# Altium PCB CartApuce.PcbDoc
Units mm, origin at the board's own origin, x right, y up, seen from the top; angles counter-clockwise.
Board outline 152.4 x 101.6 mm, 4 copper layers (Component Side, Ground Plane, Power Plane, Solder Side), stack 0.844 mm thick; 3 components, 73 nets, 51 pads, 9 vias.
Unrouted connection lines stored in the file: 1.
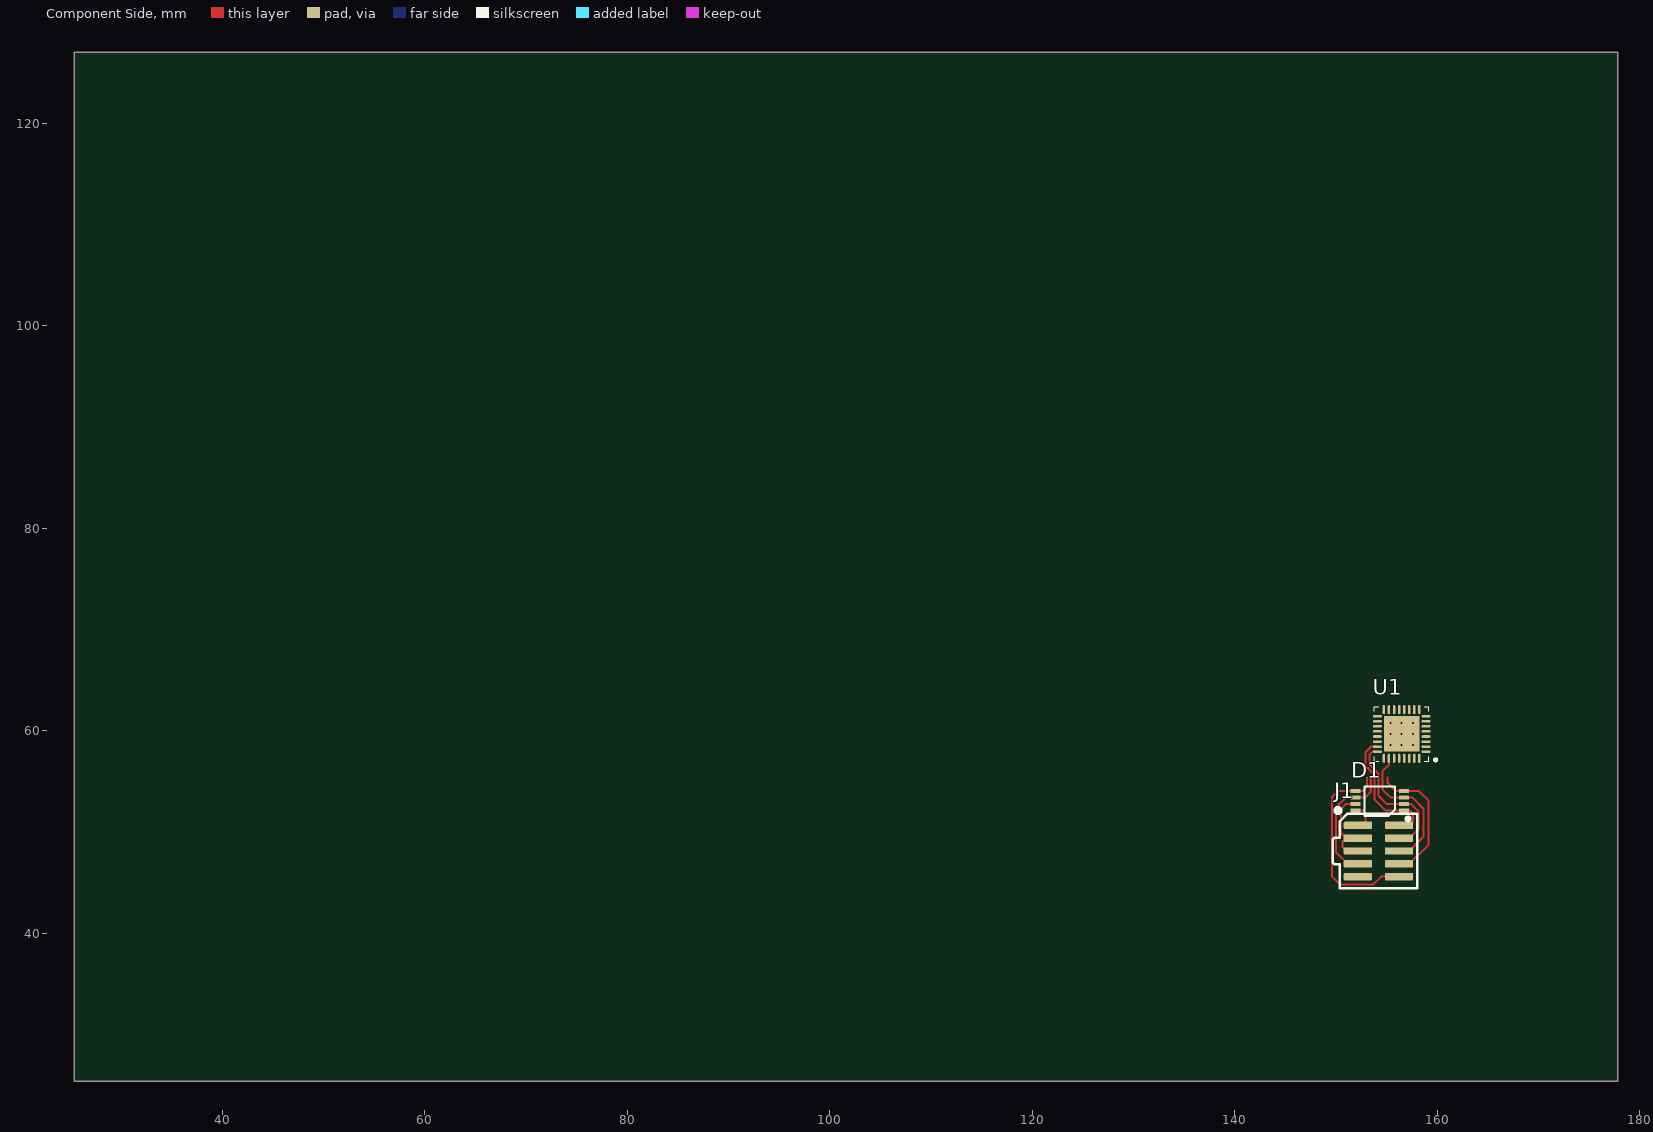
[diagram p0: Component Side view]
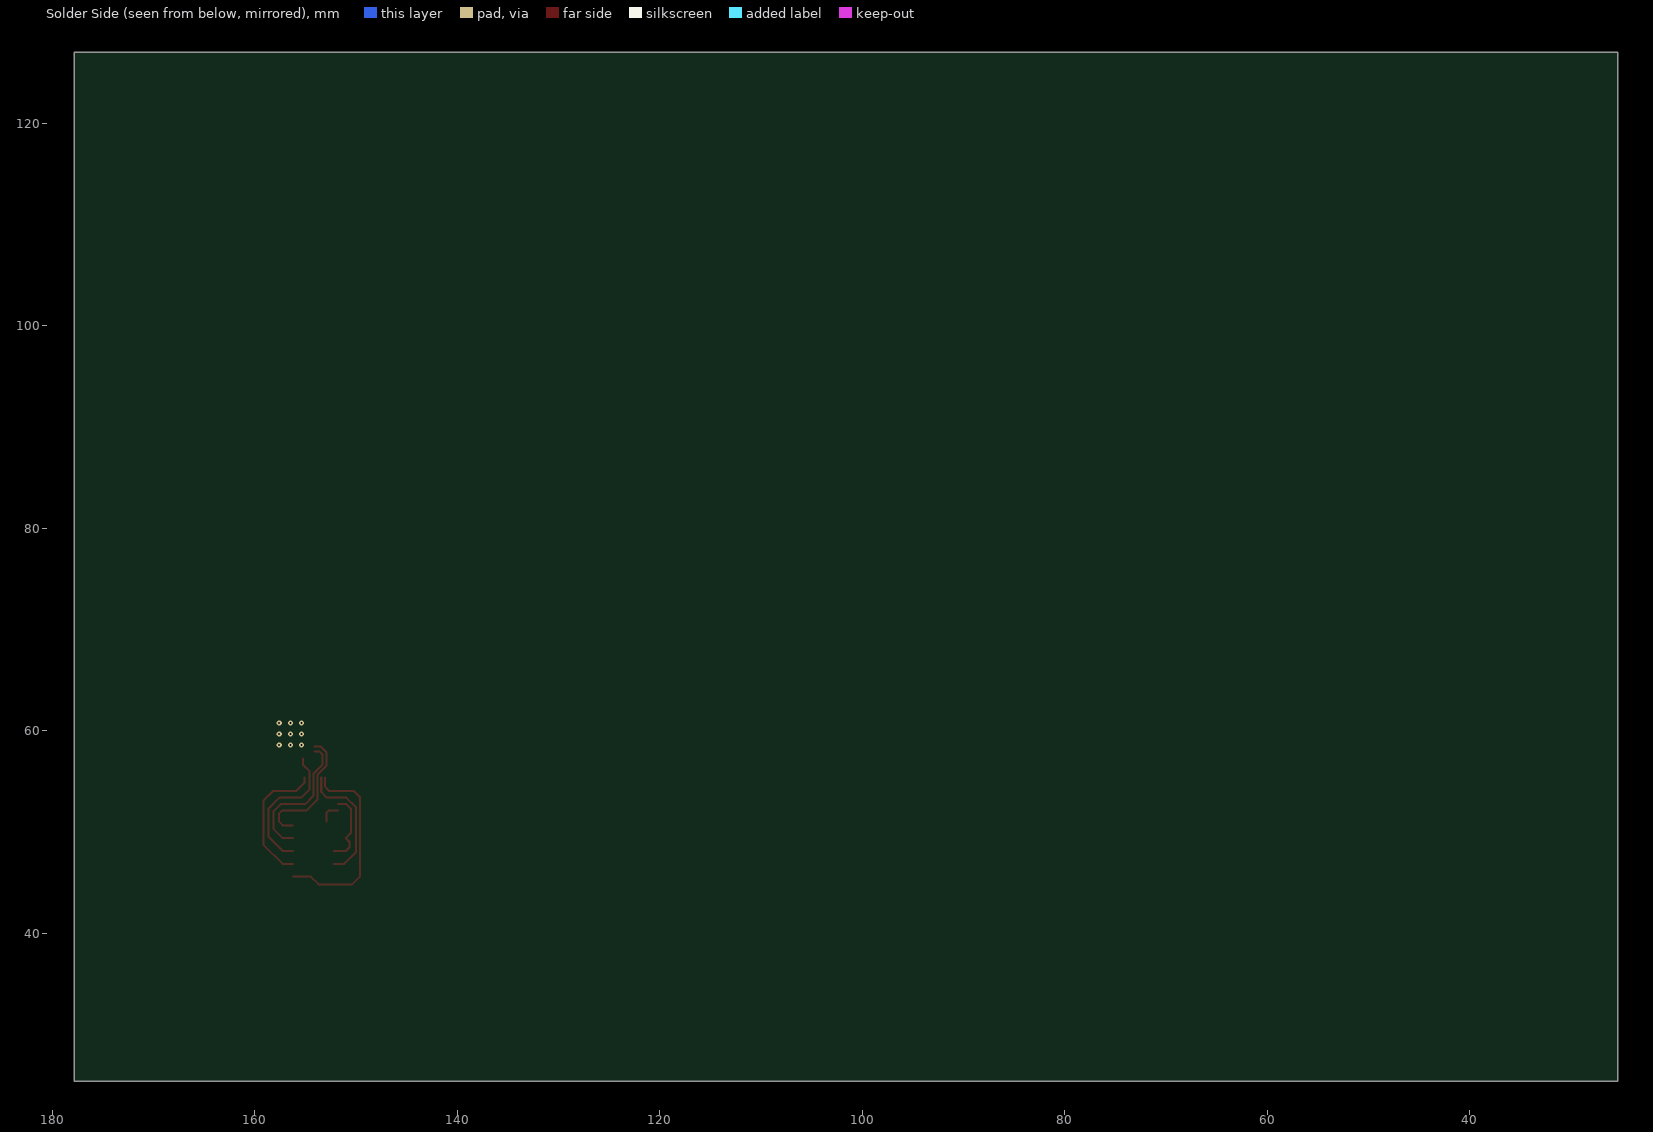
[diagram p1: Solder Side view, seen from below]
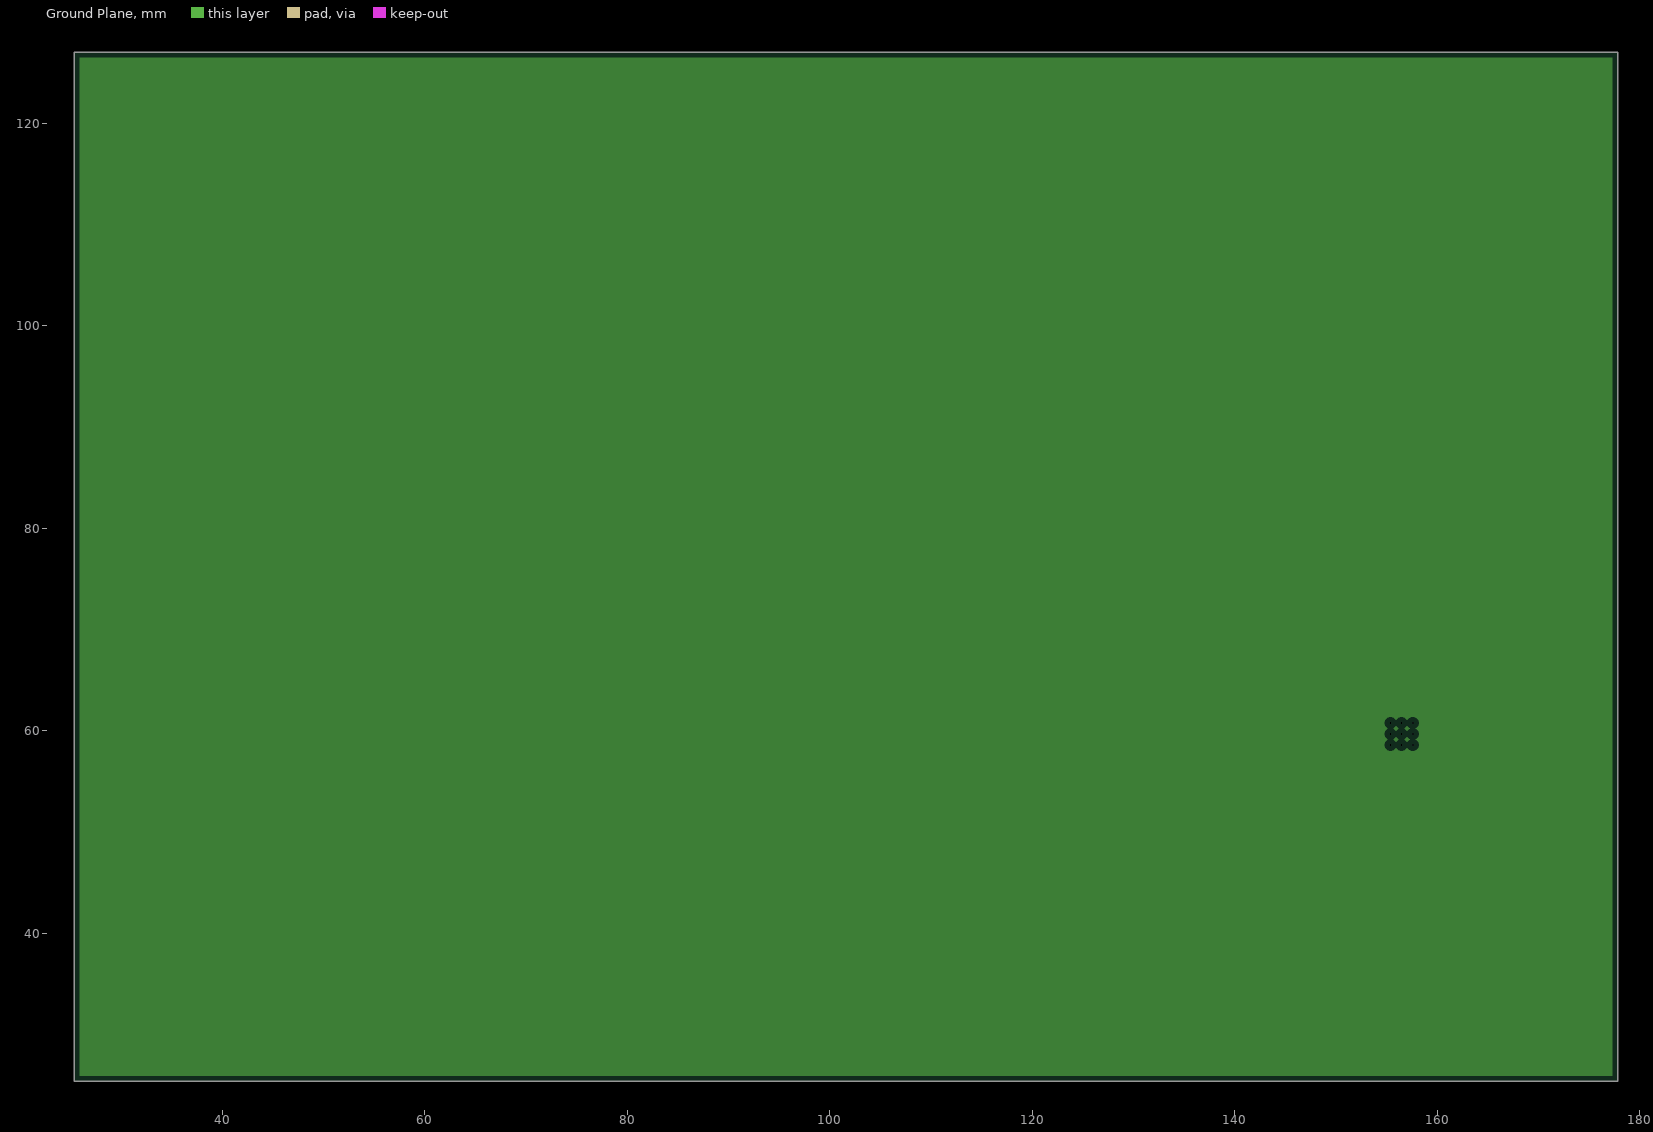
[diagram p2: Ground Plane, clearances drawn from the general rule]
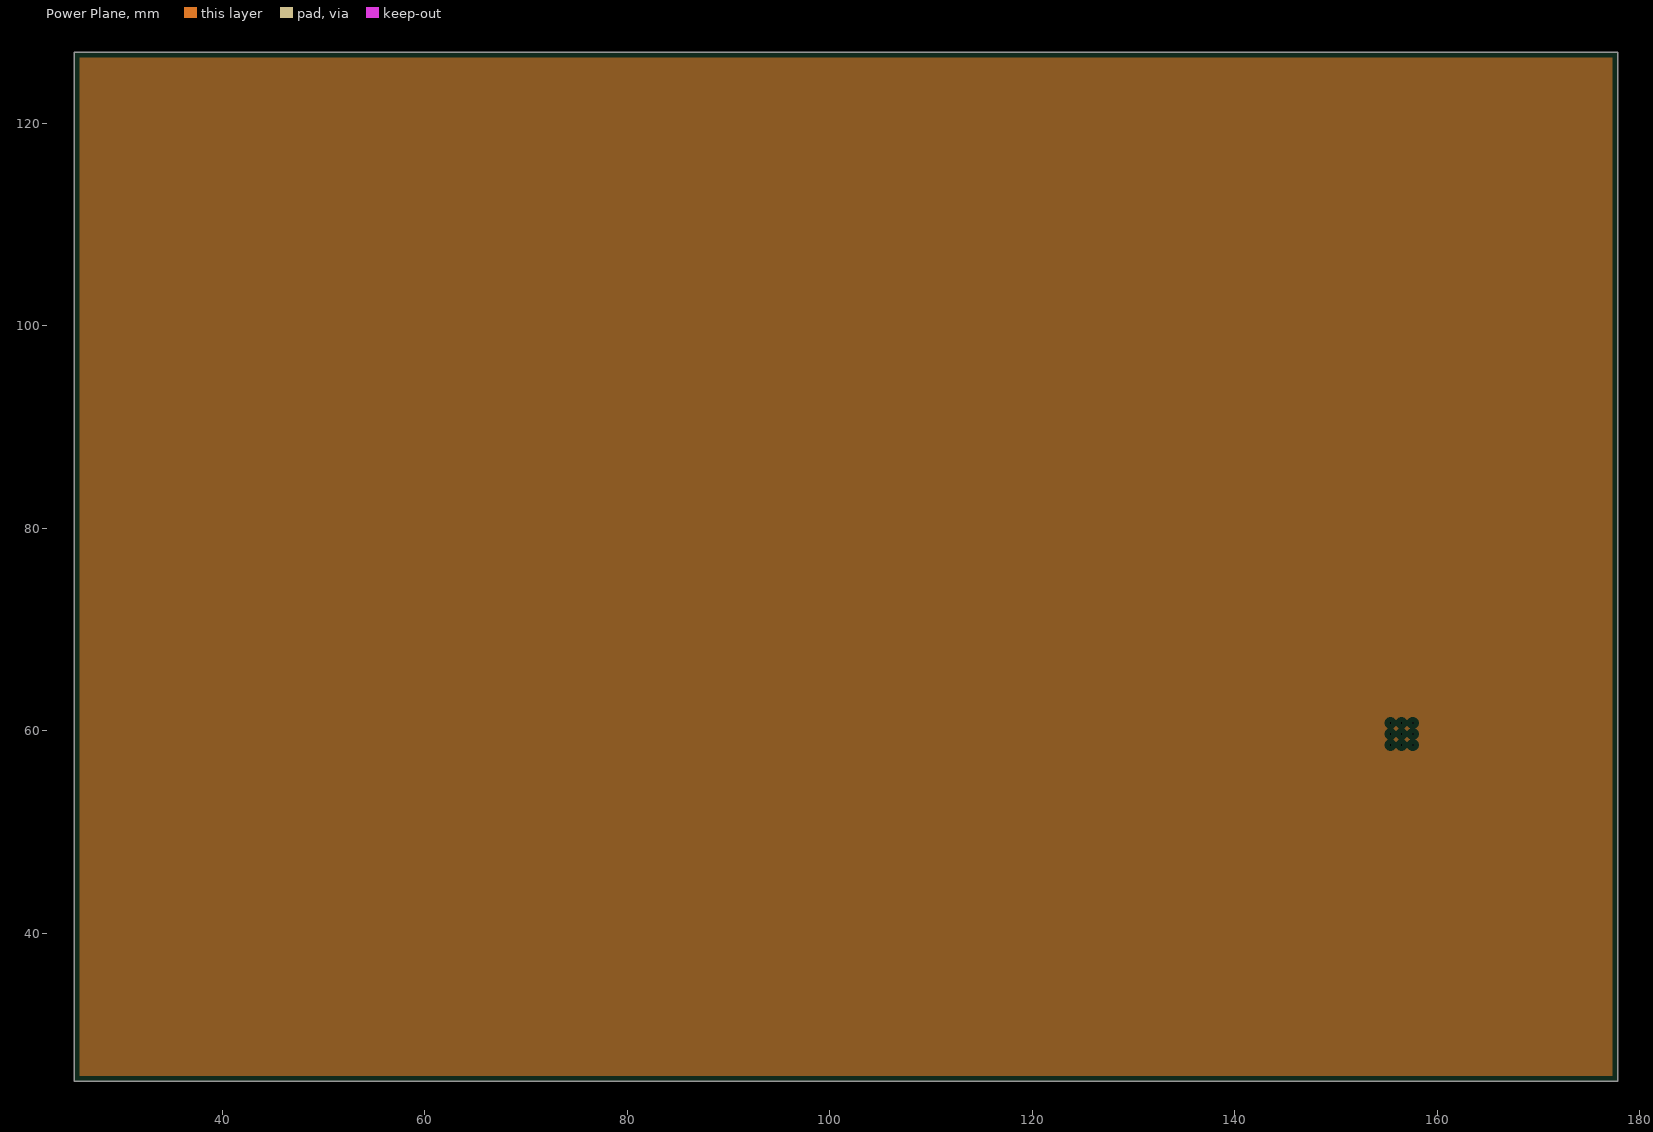
[diagram p3: Power Plane, clearances drawn from the general rule]
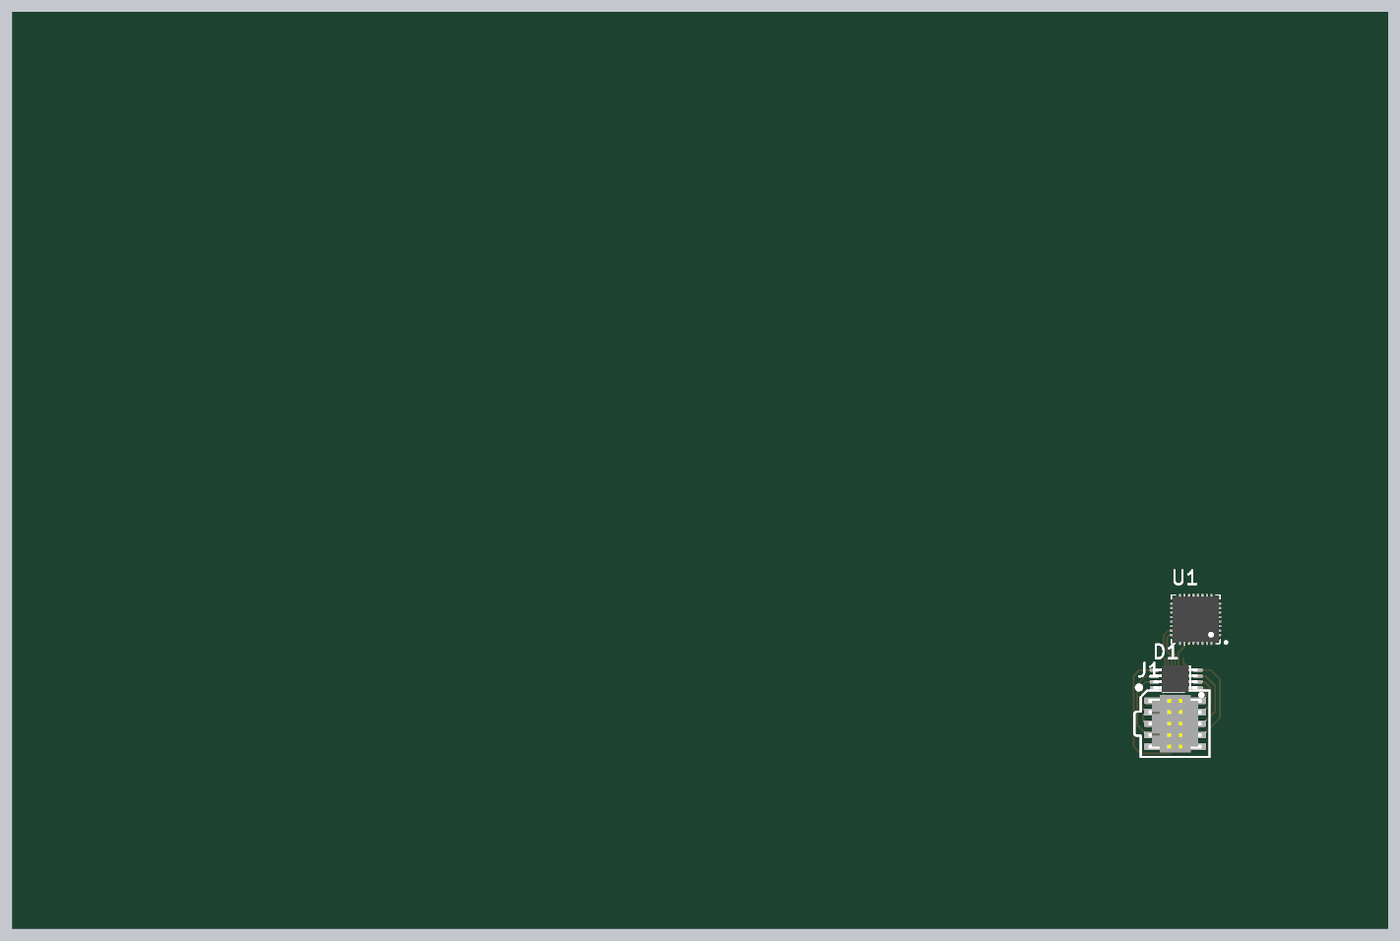
[diagram p4: 3D render of the assembled board from above, using the file's embedded part models]

## Layer stack, top to bottom
Top Solder: solder mask 0.0102, Solder Resist, Dk 3.5
Component Side: signal copper 0.0356
Dielectric 1: core 0.32, FR-4, Dk 4.8
Ground Plane: plane copper 0.036
Dielectric 3: prepreg 0.127, Dk 4.2
Power Plane: plane copper 0.036
Dielectric 4: core 0.254, Dk 4.2
Solder Side: signal copper 0.0356
Bottom Solder: solder mask 0.0102, Solder Resist, Dk 3.5

## Board outline
25.4,25.4 177.8,25.4 177.8,127 25.4,127

## Design rules (kind name [scope] priority, off if disabled: settings)
AssemblyTestPointUsage [All] p1 off:
AssemblyTestpoint [All] p1 off: testpointundercomponent=TRUE minsize=1.016 maxsize=2.54 preferedsize=1.524 minholesize=0 maxholesize=1.016 preferedholesize=0.813 testpointgrid=0.025 usegrid=TRUE gridtolerance=0 allowsidetop=TRUE allowsidebottom=TRUE
Clearance [All] p1: gap=0.15
ComponentClearance [All] p1: gap=0.2 collisioncheckmode=3 verticalgap=1 showdistances=FALSE
DiffPairsRouting [All] p1 off: maxlimit=0.254 minlimit=0.254 mostfreqgap=0.254 toplayer_minwidth=0.381 toplayer_maxwidth=0.381 toplayer_prefwidth=0.381 bottomlayer_minwidth=0.381 bottomlayer_maxwidth=0.381 bottomlayer_prefwidth=0.381 maxuncoupledlength=12.7
FabricationTestPointUsage TestPointUsage [All] p1 off: valid=0 allowmultiple=FALSE
FabricationTestpoint Testpoint [All] p1 off: side=3 testpointundercomponent=TRUE minsize=1.016 maxsize=2.54 preferedsize=1.524 minholesize=0 maxholesize=1.016 preferedholesize=0.813 testpointgrid=0.025 allowsidetop=TRUE allowsidebottom=TRUE usegrid=TRUE gridtolerance=0
FanoutControl Fanout_BGA [IsBGA] p1 off: bgadir=Out bgaviamode=Centered fanoutstyle=Auto fanoutdirection=Alternating viagrid=0.025 // Fanout_BGA (Default Rule)
FanoutControl Fanout_LCC [IsLCC] p2 off: bgadir=Out bgaviamode=Centered fanoutstyle=Auto fanoutdirection=Alternating viagrid=0.025 // Fanout_LCC (Default Rule)
FanoutControl Fanout_SOIC [IsSOIC] p3 off: bgadir=Out bgaviamode=Centered fanoutstyle=Auto fanoutdirection=Alternating viagrid=0.025 // Fanout_SOIC (Default Rule)
FanoutControl Fanout_Small [(CompPinCount < 5)] p4 off: bgadir=Out bgaviamode=Centered fanoutstyle=Auto fanoutdirection=OutThenIn viagrid=0.025 // Fanout_Small (Default Rule)
FanoutControl Fanout_Default [All] p5 off: bgadir=Out bgaviamode=Centered fanoutstyle=Auto fanoutdirection=Alternating viagrid=0.025 // Fanout_Default (Default Rule)
HoleSize [All] p1: absolutevalues=TRUE maxlimit=6 minlimit=0.15 maxpercent=80.000 minpercent=20.000
HoleToHoleClearance [All] p1: gap=0.6 allowstackedmicrovias=TRUE
MinimumSolderMaskSliver [All] p1: minsoldermaskwidth=0.075
MinimumSolderMaskSliver SilkscreenOverComponentPads [All] p2 off: minsoldermaskwidth=0.254
NetAntennae [All] p1 off: netantennaetolerance=0
PlaneClearance [All] p1: clearance=0.5
PlaneConnect [All] p1: planeconnectstyle=Relief reliefexpansion=0.4 reliefentries=4 reliefconductorwidth=0.3 reliefairgap=0.2
PolygonConnect [All] p1: connectstyle=Relief reliefconductorwidth=0.25 reliefentries=4 polygonreliefangle="90 Angle" airgapwidth=0.254
RoutingVias [All] p1: holewidth=0.2 width=0.6 viastyle="Through Hole" minholewidth=0.2 minwidth=0.6 maxholewidth=0.3 maxwidth=0.9
SilkToSilkClearance [All] p1 off: silktosilkclearance=0.1
SolderMaskExpansion [All] p1: expansion=0.05
Width [All] p1: maxlimit=3 minlimit=0.15 preferedwidth=0.2
12 further rules are at their usual default settings.

## Components (designator, comment, footprint, x,y, rotation, side; value= is the part's Value field where it differs from the comment)
D1 "82401646" MSOP-8L 154.305,53.086 r180 top
J1 "FTSH-105-01-L-DV-K" FTSH-105-01-L-DV-K 154.178,48.133 r270 top
U1 "STM32F302K8U6" QFN50P500X500X60_HS-33N 156.464,59.69 r180 top

## Footprints (in the part's own frame and the unit in brackets; to place one, negate y for a bottom-side part, rotate by r counter-clockwise, add the part's x,y. Pads: shape width x height; smd on the part's side, far side on the other; paste and mask are expansions set on the pad)
FTSH-105-01-L-DV-K [mil] "CONN HEADER 10 POS DUAL .05\" SMD"
  rrect30% 29x110 smd mask+2: 1(-100,-80) 2(-100,80) 3(-50,-80) 4(-50,80) 5(0,-80) 6(0,80) 7(50,-80) 8(50,80) 9(100,-80) 10(100,80)
  silkscreen extent -165,-177 145,150, body extent -125,-115 125,115, height 241
MSOP-8L [mm] "MSOP-8L, 8-Leads, Body 5x3mm, Pitch 0.5mm"
  rrect30% 1.016x0.406 smd: 1(-2.4,0.975) 2(-2.4,0.325) 3(-2.4,-0.325) 4(-2.4,-0.975) 5(2.4,-0.975) 6(2.4,-0.325) 7(2.4,0.325) 8(2.4,0.975)
  silkscreen extent -2.89,-1.43 1.52,1.88, body extent -2.35,-1.53 2.55,1.48, height 0.94
QFN50P500X500X60_HS-33N [mm] "QFN, 32-Leads, Body 5,00x5,00mm, Pitch 0,50mm, Thermal Pad 3,50x3,50mm, IPC Medium Density"
  oval 0.9x0.25 smd: 1(-2.4,1.75) 2(-2.4,1.25) 3(-2.4,0.75) 4(-2.4,0.25) 5(-2.4,-0.25) 6(-2.4,-0.75) 7(-2.4,-1.25) 8(-2.4,-1.75) 17(2.4,-1.75) 18(2.4,-1.25) 19(2.4,-0.75) 20(2.4,-0.25) 21(2.4,0.25) 22(2.4,0.75) 23(2.4,1.25) 24(2.4,1.75)
  oval 0.25x0.9 smd: 9(-1.75,-2.4) 10(-1.25,-2.4) 11(-0.75,-2.4) 12(-0.25,-2.4) 13(0.25,-2.4) 14(0.75,-2.4) 15(1.25,-2.4) 16(1.75,-2.4) 25(1.75,2.4) 26(1.25,2.4) 27(0.75,2.4) 28(0.25,2.4) 29(-0.25,2.4) 30(-0.75,2.4) 31(-1.25,2.4) 32(-1.75,2.4)
  rect 3.5x3.5 smd: 33(0,0)
  silkscreen extent -3.48,-2.7 2.7,2.7, body extent -2.57,-2.57 2.57,2.57, height 0.6

## Part data
D1: "TVS DIODE 5VWM 13VC 8MSOP"
J1: "CONN HEADER 10 POS DUAL .05\" SMD with Keying"

## Via types
v1: diameter 0.5, hole 0.2, Component Side to Solder Side, 9 vias

## Nets (pads, with @x,y where several pads share a name; then routed paths per layer and width w, separated by ;. In a path a pad name is that pad's centre, name@x,y a point inside that pad or via, vN(x,y) a via of type N, cw(c..) or ccw(c..) an arc to the next point about the centre after c; other vN are vias at no path point)
3L: 
3P: 
3P_ADJ: 
3P_PWR: D1.8 J1.1 | length 2.1
  Component Side w0.2: D1.8@151.778,52.111 152.695,52.111 152.908,51.898 152.908,51.054
5L: 
5P: 
12P: 
AU_LED: 
AU_NC: 
AU_NO: 
BATT_PWR: 
BATTC: 
BATTD: 
BATTE: 
BATTP: 
BD_LED: 
BD_NO: 
CMD_3L: 
CMD_3P: 
CMD_5L: 
CMD_5P: 
CMD_BATTC: 
CMD_BATTD: 
CMD_BATTE: 
CMD_BATTP: 
CMD_G_BATTC: 
CMD_G_BATTD: 
CMD_G_BATTE: 
CMD_G_BATTP: 
GND_PWR: D1.7 J1.3 J1.5 J1.9 | length 7.3
  Component Side w0.2: D1.7@151.778,52.761 150.947,52.761 150.51,52.324 150.495,52.324 150.495,49.911 151.003,49.403 150.622,49.022 150.622,48.514 151.003,48.133 J1.5
NetC19_1: 
NetC19_2: 
NetC24_2: 
NetC25_2: 
NetC26_2: 
NetC27_2: 
NetDC1_1: 
NetDC1_4: 
NetDC1_6: 
NetDC2_1: 
NetDC2_4: 
NetDC2_6: 
NetDC3_1: 
NetDC3_6: 
NetDC4_10: 
NetJ7_2: 
NetJ10_2: 
NetJ13_2: 
NetL4_1: 
NetL5_1: 
NetL6_1: 
NetL7_1: 
NetL8_1: 
NetL9_1: 
NetL10_1: 
NetL11_1: 
NetL12_1: 
NetR10_2: 
NetR11_2: 
NetR12_2: 
NetR13_2: 
NetR14_2: 
NetR15_2: 
NetR16_2: 
NetR17_2: 
PGND_PWR: 
PWR_NRST: D1.5 J1.10 | length 19.9
  Component Side w0.2: 153.066,55.372 153.066,54.514 152.613,54.061 D1.5 150.2,54.061 149.606,53.467 149.606,45.593 150.368,44.831 153.67,44.831 154.432,45.593 J1.10
PWR_SWCLK: D1.2 J1.4 U1.24 | length 13.9
  Component Side w0.2: U1.24 153.571,57.94 153.289,57.658 153.289,56.642 154.178,55.753 154.178,53.594 155.011,52.761 157.424,52.761 158.115,52.07 158.115,50.292 157.226,49.403 J1.4
PWR_SWDIO: D1.1 J1.2 U1.23 | length 13.1
  Component Side w0.2: U1.23 153.436,58.44 152.908,57.912 152.908,56.528 153.797,55.639 153.797,53.213 154.899,52.111 157.312,52.111 157.607,51.816 157.607,51.054 157.226,50.673 J1.2
PWR_SWO: D1.3 J1.6 U1.26 | length 14
  Component Side w0.2: U1.26 155.214,56.662 154.559,56.007 154.559,54.229 155.377,53.411 157.551,53.411 157.543,53.404 158.623,52.324 158.623,49.53 157.226,48.133 J1.6
PWR_SWRX: D1.6 J1.7 | length 12.5
  Component Side w0.2: J1.7 151.13,46.863 149.987,48.006 149.987,52.451 150.947,53.411 D1.6 152.852,53.411 153.416,53.975 153.416,55.372
PWR_SWTX: D1.4 J1.8 | length 13.3
  Component Side w0.2: 155.067,55.372 155.067,54.864 155.87,54.061 158.156,54.061 159.131,53.086 159.131,48.768 157.226,46.863 J1.8
SHTDWN_OVERWRITE: 
pads on no net: U1.1 U1.2 U1.3 U1.4 U1.5 U1.6 U1.7 U1.8 U1.9 U1.10 U1.11 U1.12 U1.13 U1.14 U1.15 U1.16 U1.17 U1.18 U1.19 U1.20 U1.21 U1.22 U1.25 U1.27 U1.28 U1.29 U1.30 U1.31 U1.32 U1.33
copper on no net:
  other v1: 155.364,58.59 156.464,58.59 157.564,58.59 155.364,59.69 156.464,59.69 157.564,59.69 155.364,60.79 156.464,60.79 157.564,60.79

## Polygon pours and split planes (outlines as drawn)
no net on Ground Plane (split plane): 177.29,25.91 25.91,25.91 25.91,126.49 177.29,126.49
no net on Power Plane (split plane): 177.29,25.91 25.91,25.91 25.91,126.49 177.29,126.49